# Altium PCB unicorn_1.PcbDoc
Units mm, origin at the board's own origin, x right, y up, seen from the top; angles counter-clockwise.
Board outline 47 x 47 mm, 2 copper layers (Top Layer, Bottom Layer); 55 components, 54 nets, 241 pads, 61 vias.
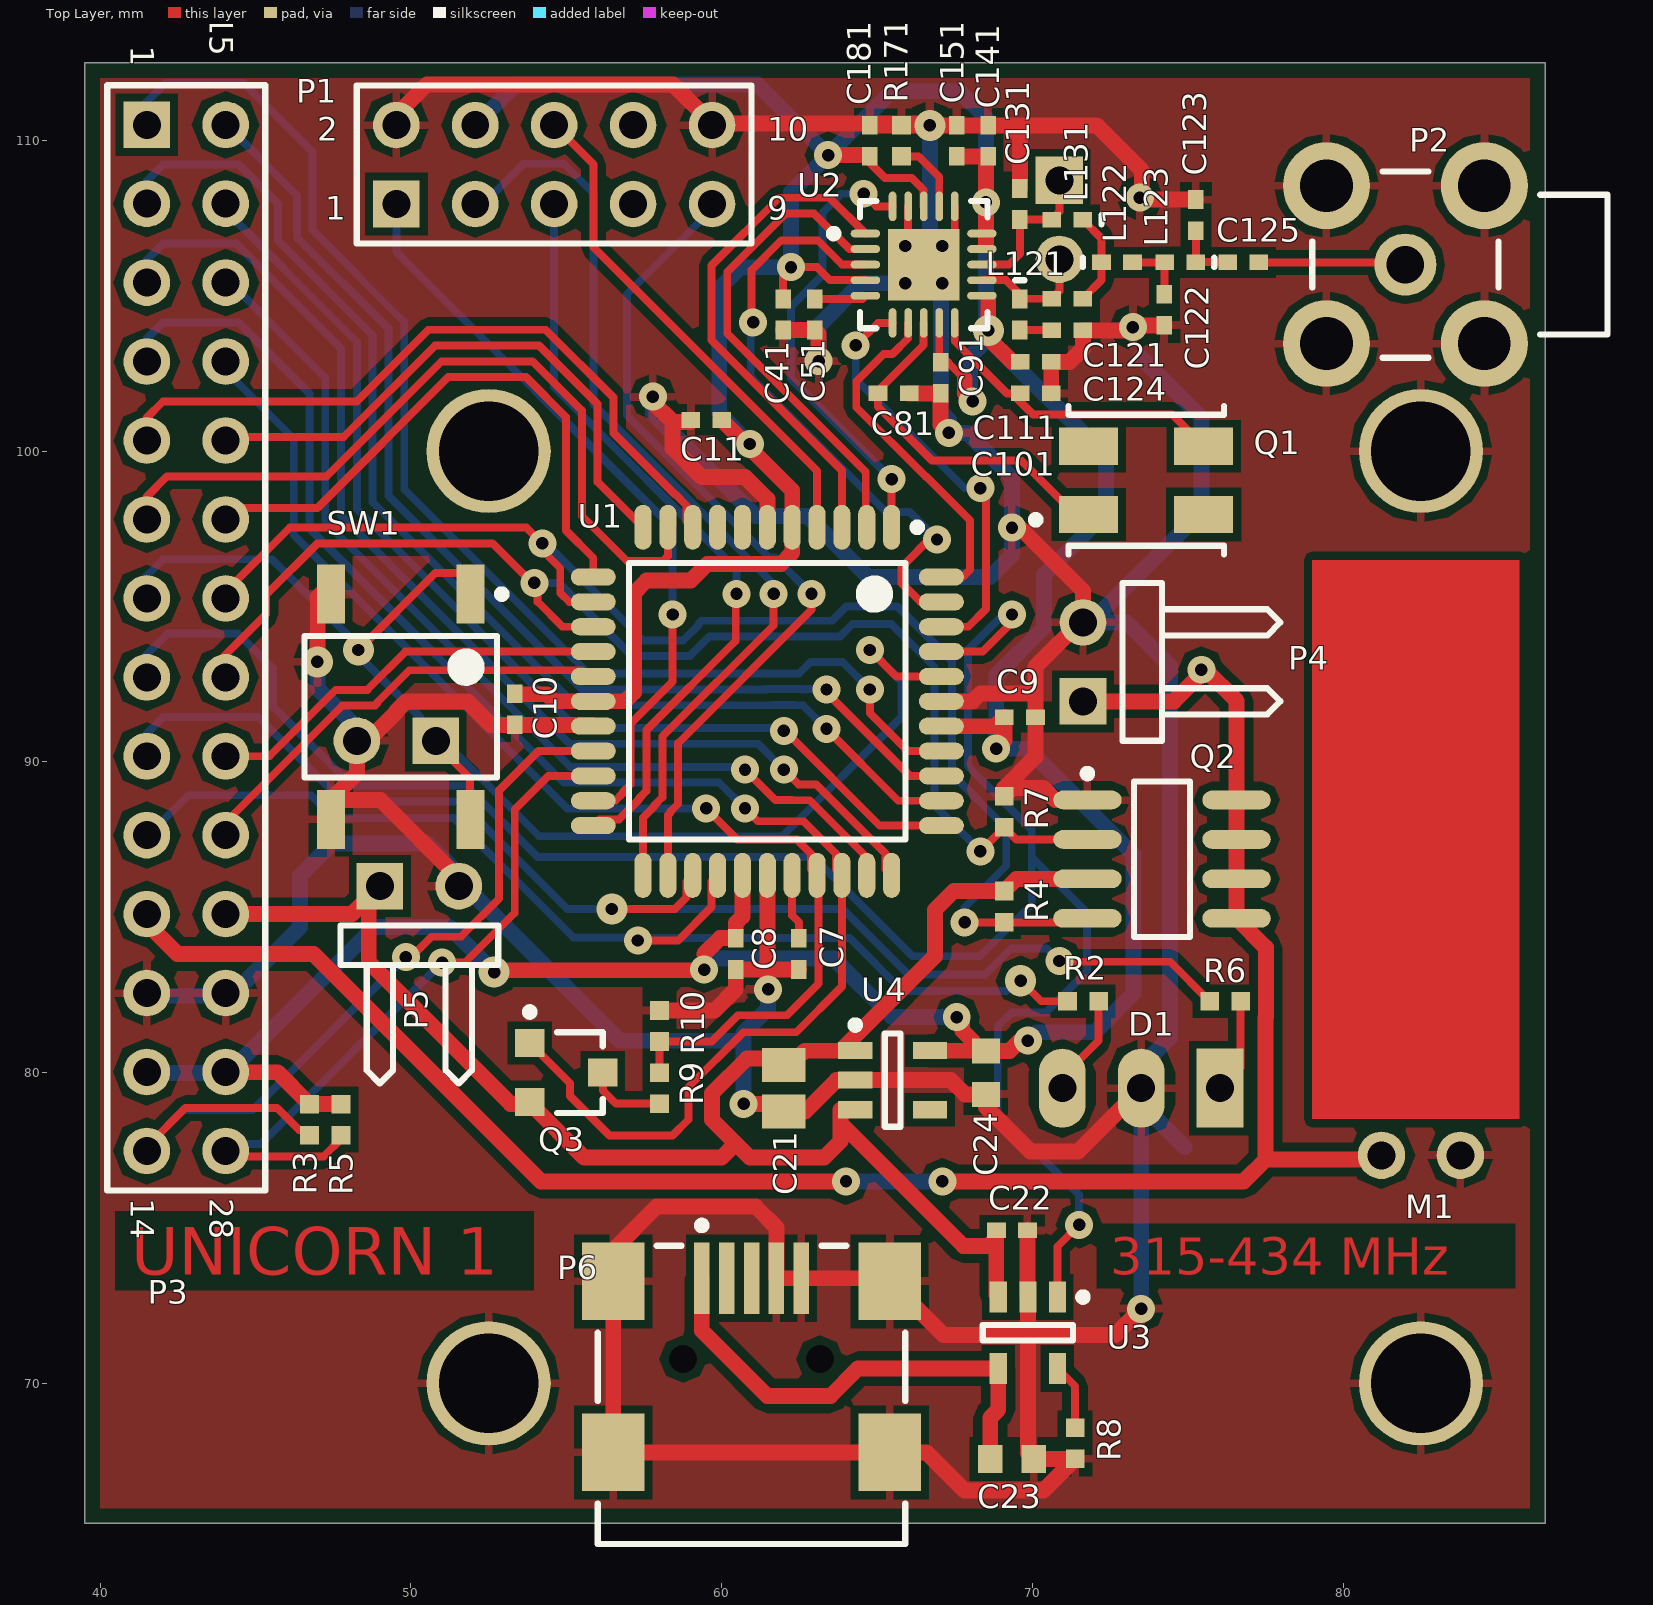
[diagram p0: Top Layer view]
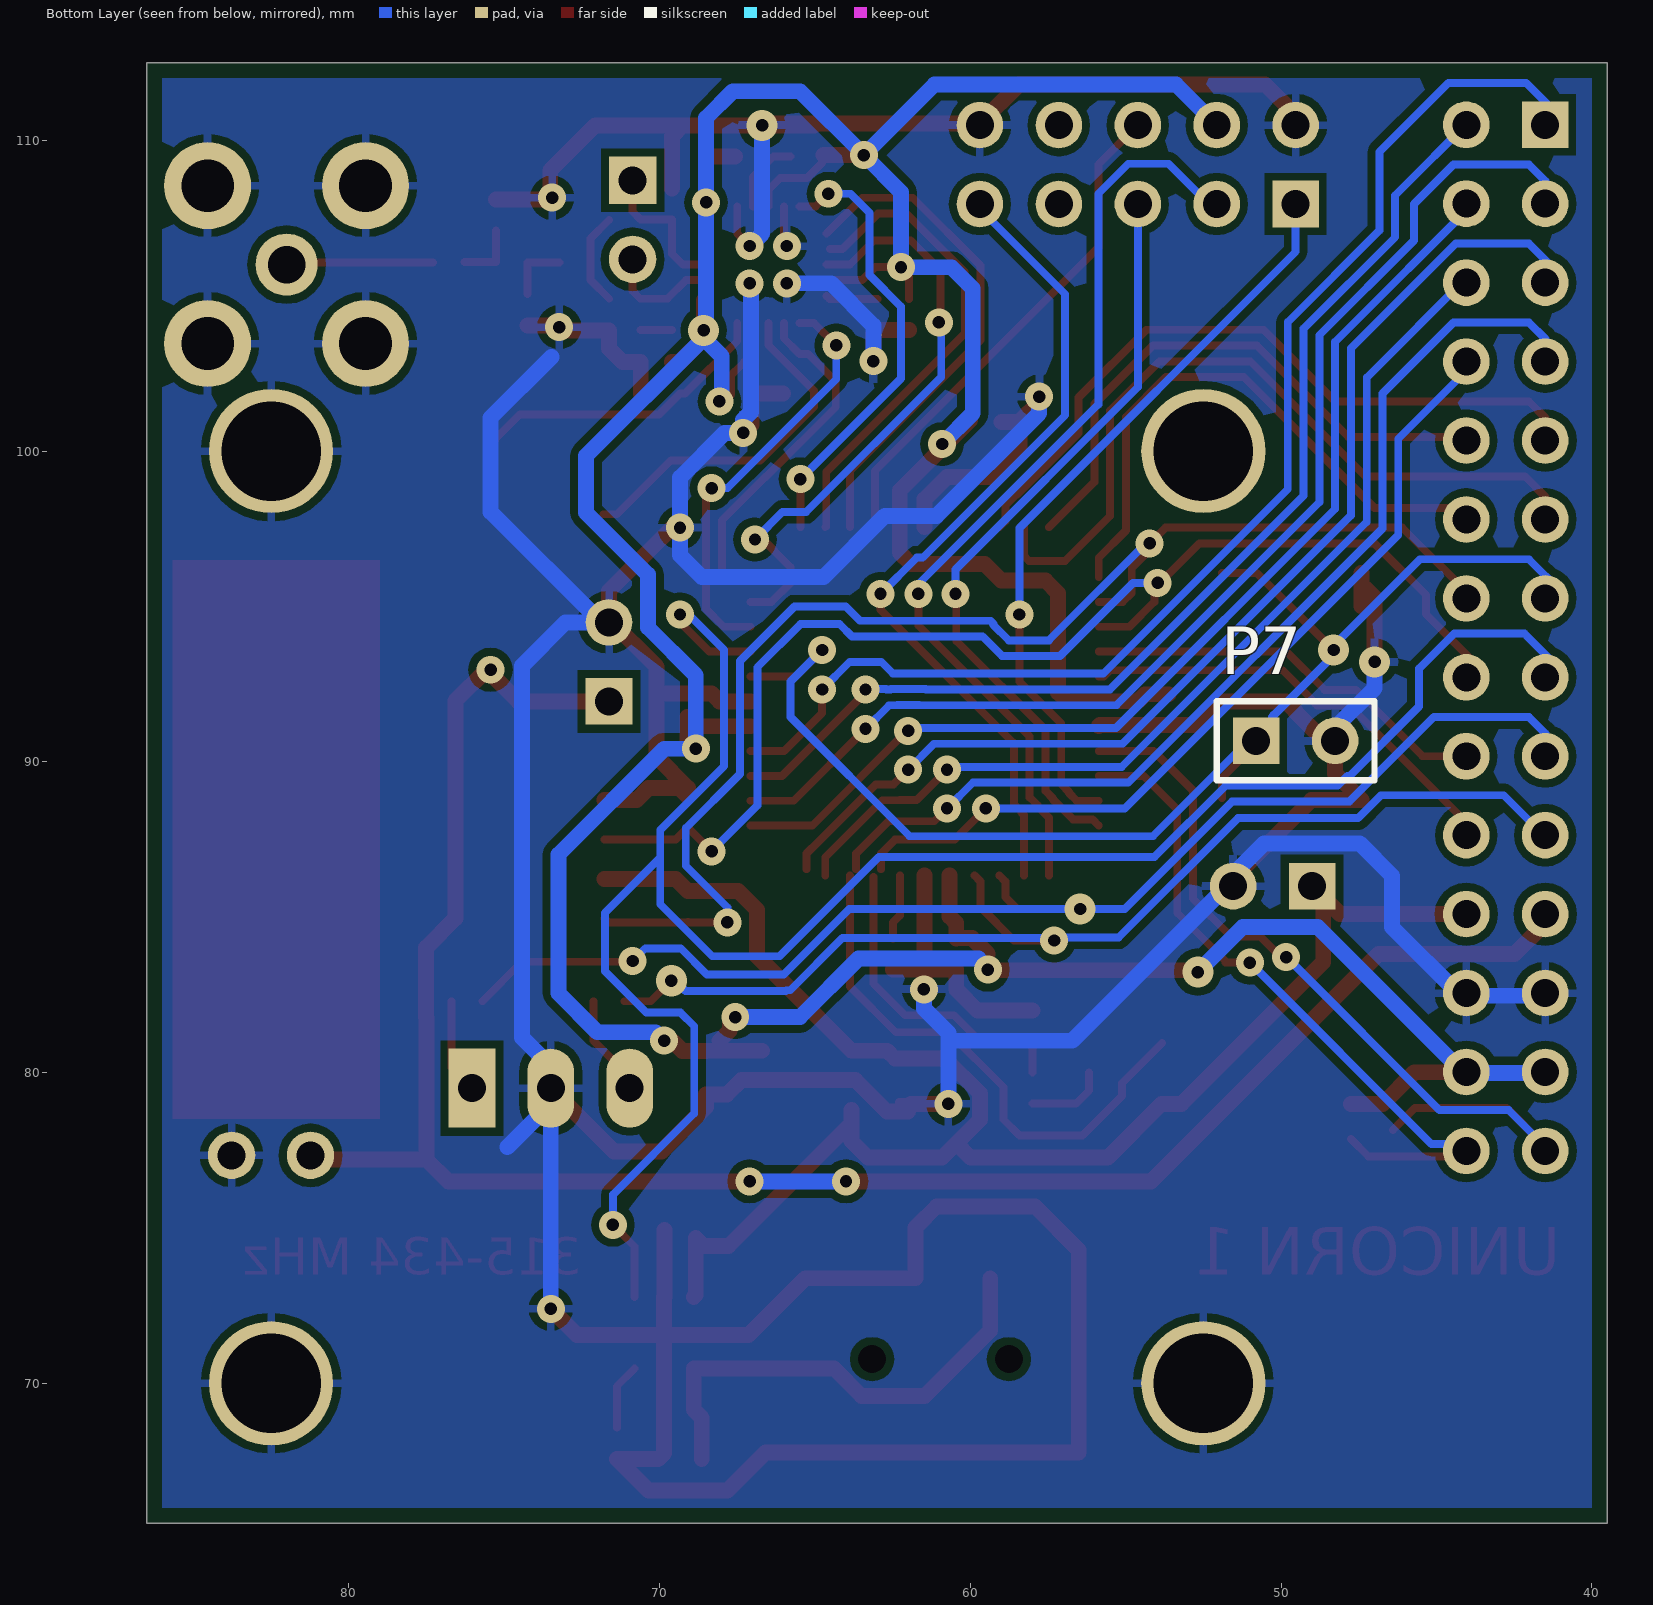
[diagram p1: Bottom Layer view, seen from below]

## Layer stack, top to bottom
Top Layer: signal copper 0.0356
Dielectric: dielectric 0.32, FR-4, Dk 4.8
Bottom Layer: signal copper 0.0356

## Board outline
39.5,112.5 86.5,112.5 86.5,65.5 39.5,65.5

## Design rules (kind name [scope] priority, off if disabled: settings)
Clearance [(IsVia) vs (IsVia)] p1 off: gap=0.2
Clearance Clearance_U1 [(InComponent('U1') or InComponent('U2'))] p2: gap=0.2
Clearance Clearance_1 [All] p3: gap=0.254
HoleSize [All] p1: absolutevalues=TRUE maxlimit=2.54 minlimit=0.4 maxpercent=80.000 minpercent=20.000
MinimumSolderMaskSliver MinimumSolderMaskSliver_U1 [(InComponent('U1') or InComponent('U2')) vs (InComponent('U1') or InComponent('U2'))] p1: minsoldermaskwidth=0.025
MinimumSolderMaskSliver [All] p2: minsoldermaskwidth=0.076
PlaneClearance [All] p1 off: clearance=0.508
PolygonConnect [All] p1: connectstyle=Relief reliefconductorwidth=0.254 reliefentries=4 polygonreliefangle="90 Angle"
RoomDefinition unicorn_1 [InComponentClass('unicorn_1')] p1: confinementstyle=ConfineIn formatcopy=TRUE lockcomponents=FALSE outline 0,0 146.71,0 146.71,143.535 0,143.535
RoutingVias [All] p1: holewidth=0.4 width=0.9 viastyle="Through Hole" minholewidth=0.254 minwidth=0.9 maxholewidth=0.42 maxwidth=1.27
SilkToSilkClearance [All] p1: silktosilkclearance=0.1
SilkscreenOverComponentPads [All] p1: minsilkscreentomaskgap=0.15
SolderMaskExpansion [All] p1: expansion=0.102
Width [(InNet('+3.3V') OR InNet('+BATT') OR InNet('OUT') OR InNet('+USB') OR InNet('GND'))] p1: maxlimit=0.512 minlimit=0.254 preferedwidth=0.254
Width Width_1 [All] p2: maxlimit=0.254 minlimit=0.254 preferedwidth=0.254
23 further rules are at their usual default settings.

## Components (designator, comment, footprint, x,y, rotation, side; value= is the part's Value field where it differs from the comment)
C7 "0.1uF" CAPC1005L 62.484,83.82 r270 top
C8 "0.1uF" CAPC1005L 60.452,83.82 r270 top
C9 "0.1uF" CAPC1005L 69.596,91.44 r0 top
C10 "0.1uF" CAPC1005L 53.34,91.694 r270 top
C11 "0.1uF" CAPC1005L 59.5,101 r180 top
C21 "10uF" CAPC2012L 62,79.5 r270 top
C22 "0.1uF" CAPC1005L 69.342,74.93 r180 top
C23 "1uF" CAPC1608L 69.342,67.564 r180 top
C24 "1uF" CAPC1608L 68.5,80 r270 top
C41 "100nF" CAPC1005L 61.976,104.394 r90 top
C51 "100nF" CAPC1005L 62.992,104.394 r90 top
C81 "27pF" CAPC1005L 65.532,101.854 r180 top
C91 "10nF" CAPC1005L 67.056,102.362 r90 top
C101 "27pF" CAPC1005L 70.104,101.854 r180 top
C111 "220pF" CAPC1005L 70.104,102.87 r180 top
C121 "6.8 pF" CAPC1005L 71.12,104.902 r180 top
C122 "12 pF" CAPC1005L 74.244,104.546 r90 top
C123 "6.8 pF" CAPC1005L 75.26,107.594 r270 top
C124 "220pF" CAPC1005L 71.12,103.886 r0 top
C125 "220pF" CAPC1005L 76.784,106.07 r180 top
C131 "6.8 pF" CAPC1005L 69.596,107.95 r90 top
C141 "10nF" CAPC1005L 68.58,109.982 r270 top
C151 "220pF" CAPC1005L 67.564,109.982 r270 top
C181 "220pF" CAPC1005L 64.77,109.982 r270 top
D1 "LEDx2 DIP" LEDx2 73.5,79.5 r270 top
L121 "33nH" INDC1005AL 69.596,104.394 r270 top
L122 "18nH" INDC1005AL 72.72,106.07 r0 top
L123 "33nH" INDC1005AL 74.752,106.07 r180 top
L131 "33nH" INDC1005AL 71.12,107.442 r180 top
M1 "Motor" Motor 82.5,87.5 r270 top
P1 "JTAG" HDR2X5 49.53,107.95 r0 top
P2 "COAX-F" MCX5.08-H5 82,106 r180 top
P3 "Header 14X2A" HDR2X14_CEN 41.5,110.5 r270 top
P4 "OUT" HDR1X2H 71.628,91.948 r90 top
P5 "POWER" HDR1X2H 49,86 r0 top
P6 "minUSB" 440479 60.96,65.532 r270 top
P7 "SW_connect" HDR1X2 50.8,90.678 r180 bottom
Q1 "quartz SMD" quartz_pattern 73.66,99.06 r0 top
Q2 "IRF9952" SO-8_N 74.168,86.868 r0 top
Q3 "IRLML6302" SOT-23 55,80 r270 top
R2 "100" RESC1005L 71.628,82.296 r180 top
R3 "10K" RESC1005L 46.736,78.486 r270 top
R4 "100K" RESC1005L 69.088,85.344 r270 top
R5 "10K" RESC1005L 47.752,78.486 r270 top
R6 "100" RESC1005L 76.2,82.296 r180 top
R7 "100K" RESC1005L 69.088,88.392 r90 top
R8 "2K" RESC1005L 71.374,68.072 r270 top
R9 "10K" RESC1005L 58,79.5 r90 top
R10 "10K" RESC1005L 58,81.5 r90 top
R171 "56K" RESC1005L 65.786,109.982 r270 top
SW1 "SWT-32" "SWT-32 pattern" 49.674,91.773 r270 top
U1 "ATmega32L-8AI" 44A_L 61.468,91.948 r270 top locked
U2 "CC1101" QFN50P397X397X80-20N 66.5,106 r0 top
U3 "LTC4054" SOT95P270X100-5N 69.85,71.628 r270 top
U4 "AAT3221" SOT95P280X145-5N 65.5,79.756 r0 top

## Footprints (in the part's own frame and the unit in brackets; to place one, negate y for a bottom-side part, rotate by r counter-clockwise, add the part's x,y. Pads: shape width x height; smd on the part's side, far side on the other; paste and mask are expansions set on the pad)
44A_L [mm] "Thin QFP, 44-Leads, Body 10x10mm, Pitch 0.8mm, IPC High Density"
  oval 1.45x0.55 smd: 1(-5.6,4) 2(-5.6,3.2) 3(-5.6,2.4) 4(-5.6,1.6) 5(-5.6,0.8) 6(-5.6,0) 7(-5.6,-0.8) 8(-5.6,-1.6) 9(-5.6,-2.4) 10(-5.6,-3.2) 11(-5.6,-4) 23(5.6,-4) 24(5.6,-3.2) 25(5.6,-2.4) 26(5.6,-1.6) 27(5.6,-0.8) 28(5.6,0) 29(5.6,0.8) 30(5.6,1.6) 31(5.6,2.4) 32(5.6,3.2) 33(5.6,4)
  oval 0.55x1.45 smd: 12(-4,-5.6) 13(-3.2,-5.6) 14(-2.4,-5.6) 15(-1.6,-5.6) 16(-0.8,-5.6) 17(0,-5.6) 18(0.8,-5.6) 19(1.6,-5.6) 20(2.4,-5.6) 21(3.2,-5.6) 22(4,-5.6) 34(4,5.6) 35(3.2,5.6) 36(2.4,5.6) 37(1.6,5.6) 38(0.8,5.6) 39(0,5.6) 40(-0.8,5.6) 41(-1.6,5.6) 42(-2.4,5.6) 43(-3.2,5.6) 44(-4,5.6)
  silkscreen extent -5.72,-4.45 4.45,4.95, body extent -5,-5 5,5, height 1.2
440479 [mm] "Connector; USB2.0, Type AB, SM; 5 Position; Right Angle"
  rect 2.3x0.5 smd: 1(-7.85,-1.6) 2(-7.85,-0.8) 3(-7.85,0) 4(-7.85,0.8) 5(-7.85,1.6)
  rect 2.5x2 smd: 6(-7.75,4.45) 7(-2.25,4.45) 8(-7.75,-4.45) 9(-2.25,-4.45)
  round 0.6 hole 0.9 unplated: MH1(-5.25,2.2) MH2(-5.25,-2.2)
  silkscreen extent -9.67,-4.95 0.7,4.95
CAPC1005L [mm] "Chip Capacitor, Body 1.0x0.5mm, IPC High Density"
  rect 0.6x0.5 smd: 1(-0.5,0) 2(0.5,0)
  body extent -0.55,-0.3 0.55,0.3, height 1.3
CAPC1608L [mm] "Chip Capacitor, Body 1.6x0.8mm, IPC High Density"
  rect 0.8x0.9 smd: 1(-0.7,0) 2(0.7,0)
  body extent -0.87,-0.48 0.87,0.48, height 1.3
CAPC2012L [mm] "Chip Capacitor, Body 2.0x1.3mm, IPC High Density"
  rect 1.1x1.4 smd: 1(-0.75,0) 2(0.75,0)
  body extent -1.1,-0.72 1.1,0.72, height 1.4
HDR1X2 [mm] "Connector; Header; 2 Position"
  rect 1.5x1.5 hole 0.9: 1(0,0)
  round 1.5 hole 0.9: 2(2.54,0)
  silkscreen extent -1.27,-1.27 3.81,1.27
HDR1X2H [mm] "Connector; Header; 2 Position; Right Angle"
  rect 1.5x1.5 hole 0.9: 1(0,0)
  round 1.5 hole 0.9: 2(2.54,0)
  silkscreen extent -1.27,-6.35 3.81,-1.27
HDR2X5 [mm] "Connector; Header; 5x2 Position"
  rect 1.5x1.5 hole 0.9: 1(0,0)
  round 1.5 hole 0.9: 2(0,2.54) 3(2.54,0) 4(2.54,2.54) 5(5.08,0) 6(5.08,2.54) 7(7.62,0) 8(7.62,2.54) 9(10.16,0) 10(10.16,2.54)
  silkscreen extent -1.27,-1.27 11.43,3.81
HDR2X14_CEN [mm] "Connector; Header; 14x2 Position"
  rect 1.5x1.5 hole 0.9: 1(0,0)
  round 1.5 hole 0.9: 2(2.54,0) 3(5.08,0) 4(7.62,0) 5(10.16,0) 6(12.7,0) 7(15.24,0) 8(17.78,0) 9(20.32,0) 10(22.86,0) 11(25.4,0) 12(27.94,0) 13(30.48,0) 14(33.02,0) 15(0,2.54) 16(2.54,2.54) 17(5.08,2.54) 18(7.62,2.54) 19(10.16,2.54) 20(12.7,2.54) 21(15.24,2.54) 22(17.78,2.54) 23(20.32,2.54) 24(22.86,2.54) 25(25.4,2.54) 26(27.94,2.54) 27(30.48,2.54) 28(33.02,2.54)
  silkscreen extent -1.27,-1.27 34.29,3.81
INDC1005AL [mm] "Chip Inductor, Body 1.0x0.5mm, IPC High Density"
  rect 0.6x0.5 smd: 1(-0.5,0) 2(0.5,0)
  silkscreen extent -1.1,-0.15 -1.1,0.15, body extent -0.55,-0.3 0.55,0.3, height 0.55
LEDx2 [mm]
  rect 2.54x1.508 hole 0.9: 1(0,2.54)
  oval 2.54x1.508 hole 0.9: 2(0,0) 3(0,-2.54)
MCX5.08-H5 [mm] "Connector; RF Coaxial, MCX, Thru-Hole; 5 Position; Right-Angle"
  round 2 hole 1.2: 1(0,0)
  round 2.8 hole 1.7: 2(-2.54,-2.54) 3(2.54,-2.54) 4(2.54,2.54) 5(-2.54,2.54)
  silkscreen extent -6.5,-3 3,3
Motor [mil] "площадка под вибромотор"
  round 60 hole 35.43: 1(400,50) 2(400,-50)
  Top Layer region: -354.33,-137.8 354.33,-137.8 354.33,125 -354.33,125
QFN50P397X397X80-20N [mm] "QFN, 20-Leads, Body 4,1x4,1mm (max), Pitch 0,50mm, IPC Medium Density"
  oval 0.95x0.25 smd: 1(-1.875,1) 2(-1.875,0.5) 3(-1.875,0) 4(-1.875,-0.5) 5(-1.875,-1) 11(1.875,-1) 12(1.875,-0.5) 13(1.875,0) 14(1.875,0.5) 15(1.875,1)
  oval 0.25x0.95 smd: 6(-1,-1.875) 7(-0.5,-1.875) 8(0,-1.875) 9(0.5,-1.875) 10(1,-1.875) 16(1,1.875) 17(0.5,1.875) 18(0,1.875) 19(-0.5,1.875) 20(-1,1.875)
  rect 2.3x2.3 smd: 21(0,0)
  silkscreen extent -3.02,-2.05 2.05,2.05, body extent -2.05,-2.05 2.05,2.05, height 0.8
quartz_pattern [mm] "LCC, 4-Pins, Body 5,0x3,2mm (max), Pitch 2,30mm, IPC Medium Density"
  rect 1.9x1.2 smd: 1(-1.85,-1.1) 2(1.85,-1.1) 3(1.85,1.1) 4(-1.85,1.1)
  silkscreen extent -3.68,-2.38 2.5,2.38, body extent -2.64,-1.6 2.5,1.74, height 1
RESC1005L [mm] "Chip Resistor, Body 1.1x0.5mm, IPC High Density"
  rect 0.6x0.6 smd: 1(-0.5,0) 2(0.5,0)
  body extent -0.55,-0.3 0.55,0.3, height 2.54
SO-8_N [mm] "SOIC, 8-Leads, Body 4.9x3.9mm, Pitch 1.27mm, IPC Medium Density"
  oval 2.2x0.6 smd: 1(-2.4,1.905) 2(-2.4,0.635) 3(-2.4,-0.635) 4(-2.4,-1.905) 5(2.4,-1.905) 6(2.4,-0.635) 7(2.4,0.635) 8(2.4,1.905)
  silkscreen extent -2.52,-2.5 0.9,2.88, body extent -1.95,-2.45 1.95,2.45, height 1.75
SOT95P270X100-5N [mm] "SOT23, 5-Leads, Body 2,9x2,8mm (max), Pitch 0,95mm, IPC Medium Density"
  rect 1x0.55 smd: 1(-1.15,0.95) 2(-1.15,0) 3(-1.15,-0.95) 4(1.15,-0.95) 5(1.15,0.95)
  silkscreen extent -1.27,-1.45 0.25,1.9, body extent -0.87,-1.45 0.87,1.45, height 1
SOT95P280X145-5N [mm] "SOT23, 5-Leads, Body 3,0x3,0mm (max), Pitch 0,95mm, IPC Medium Density"
  rect 1.1x0.55 smd: 1(-1.2,0.95) 2(-1.2,0) 3(-1.2,-0.95) 4(1.2,-0.95) 5(1.2,0.95)
  silkscreen extent -1.32,-1.5 0.25,1.9, body extent -0.85,-1.5 0.85,1.5, height 1.45
SOT-23 [mm] "SOT-23; 3 Leads; Body 3.1 x 2.5 mm, inc. leads (LxW max)"
  rect 0.9x0.95 smd: 1(-0.95,-1.175) 2(0.95,-1.175) 3(0,1.175)
  silkscreen extent -2.07,-1.3 1.3,1.18
"SWT-32 pattern" [mm] "SOP, 4-Leads, Body 6,2x6,2mm (max), Pitch 4,50mm, IPC Medium Density"
  rect 1.9x0.9 smd: 1(-3.625,2.25) 2(3.625,2.25) 3(-3.625,-2.25) 4(3.625,-2.25)
  silkscreen extent -3.75,-3.1 2.28,3.38, body extent -3.1,-3.1 3.1,3.1, height 3.2

## Part data
C7 C8 C9 C10 C11 C22 C23 C24 C41 C51 C81 C91 C101 C111 C121 C122 C123 C124 C125 C131 C141 C151 C181: library part "Cap Semi", "Capacitor (Semiconductor SIM Model)"
C21: library part "Cap Pol3", "Polarized Capacitor (Surface Mount)"
D1: library part LEDx2, "in DIP"
L121 L122 L123 L131: library part Inductor, "Inductor"
P1: library part "Header 5X2", "Header, 5-Pin, Dual row"
P2: "RF Coaxial PCB Connector, MCX; Thru-Hole, Right-Angle Mount Socket, Blunt Post Terminal, 50 Ohm Impedance"
P3: "Header, 14-Pin, Dual row"
P4 P5: library part "Header 2H", "Header, 2-Pin, Right Angle"
P6: library part 440478-2, "USB 2.0, Right Angle, SMT, A Type, Receptacle, 5 Position, Black"
P7: library part "Header 2", "Header, 2-Pin"
Q1: library part "qartz 0532", "в корпусе 0532"
Q2 Q3: "HEXFET Power MOSFET"
R2 R3 R4 R5 R6 R7 R8 R9 R10 R171: library part "Res Semi", "Semiconductor Resistor"
SW1: "Кнопка тактовая, поверхностный монтаж"
U1: "8-Bit AVR Microcontroller with 32K Bytes of In-System Programmable Flash Memory"
U2: "Low-Power Sub-1 GHz RF Transceiver"
U3: "Standalone Linear  Li-Ion Battery Charger with  Thermal Regulation in ThinSOT"
U4: "PowerLinear NanoPower low   dropout (LDO) linear regulator."

## Free pads (board coordinates)
  round 1.524 hole 0.9: 0(70.866,106.172)
  round 4 hole 3.2: 1(52.5,70) 1(52.5,100) 1(82.5,70) 1(82.5,100)
  rect 1.524x1.524 hole 0.9: 1(70.866,108.712)

## Via types
v1: diameter 0.9, hole 0.4, Top Layer to Bottom Layer, 50 vias
v2: diameter 1, hole 0.4, Top Layer to Bottom Layer, 7 vias
v3: diameter 0.9, hole 0.4, Top Layer to Bottom Layer, tented top, 4 vias

## Nets (pads, with @x,y where several pads share a name; then routed paths per layer and width w, separated by ;. In a path a pad name is that pad's centre, name@x,y a point inside that pad or via, vN(x,y) a via of type N, cw(c..) or ccw(c..) an arc to the next point about the centre after c; other vN are vias at no path point)
+3.3V: C8.1 C9.1 C10.1 C11.1 C24.1 C41.2 C91.2 C111.2 C141.2 C151.2 C181.2 P1.4 P3.13 P3.27 R3.1 R5.1 U1.5 U1.17 U1.27 U1.38 U2.4 U2.9 U2.11 U2.14 U2.15 U2.18 U4.5 | length 148.5
  Top Layer w0.254: C41.2 61.976,105.664 v1(62.23,105.918) 63.068,105.918 63.486,105.5 U2.4 ; C181.2 64.77,109.271 65.253,108.788 66.116,108.788 66.5,108.404 U2.18 ; C91.2@67,103.06 U2.9 ; C91.2@67.277,102.862 67.818,102.321
  Top Layer w0.508: P3.27@44.04,80.238 44.268,80.01 45.712,80.01 R3.1 R5.1 ; v2@53.13,83.294 v1@59.418,83.294 ; 53.611,92.177 54.381,92.177 54.61,91.948 U1.17 56.891,91.948 57.175,92.233 57.175,95.428 57.582,95.834 59.004,95.834 59.539,96.369 61.91,96.369 62.268,96.727 U1.5 62.268,98.732 C11.1 ; 59.436,83.82 59.944,84.328 60.444,84.328 C8.1 60.452,84.811 60.668,85.027 U1.27 ; v1(63.424,109.525) C181.2@64.727,109.525 ; U4.5 C24.1@68.5,80.706 ; U1.38 68.804,91.148 C9.1 v1@69.096,90.686 ; C151.2 68.504,109.482 v1(68.504,108.001) 68.504,106.68 ; v1@67.742,81.788 67.742,81.356 C24.1@68.072,81.026 ; v1@67.818,101.854 67.818,102.321 ; C24.1 69.27,80.7 v1@69.596,81.026 ; 68.58,104.851 v2(68.58,103.886) 68.58,103.642 69.352,102.87 C111.2
  Bottom Layer w0.508: P3.13@41.5,80.238 41.753,79.985 44.12,79.985 48.819,84.684 51.232,84.684 v2(52.68,83.236) ; P1.4@51.764,110.184 53.378,111.798 61.151,111.798 v1(63.424,109.525) ; 59.741,83.668 63.602,83.668 65.481,81.788 v1(67.564,81.788) v1@67.742,81.788 ; v1(60.909,100.228) 59.919,101.219 59.919,105.232 60.604,105.918 v1(62.23,105.918) 62.23,108.331 v1(63.424,109.525) ; v1@68,101.6 68,103.052 68.58,103.632 72.365,99.847 72.365,98.02 70.37,96.025 70.37,94.322 68.834,92.786 v1(68.834,90.424) 69.85,90.424 73.254,87.02 73.254,82.554 72,81.3 v1@70.124,81.3 ; v2(68.58,103.886) 68.504,103.962 v1(68.504,108.001) 68.504,110.719 67.64,111.582 65.481,111.582 v1(63.424,109.525)
  other v1: 69.85,81.026 59.436,83.312 68.072,101.6
+BATT: C21.1 C22.2 P3.25 P5.1 Q2.3 Q3.2 R4.1 U3.3 U4.1 U4.3 | length 54.2
  Top Layer w0.508: P3.25@43.9,85.1 48.1,85.1 P5.1 ; P5.1@48.641,85.641 48.641,83.557 53.204,78.994 53.848,78.994 55.578,77.264 59.992,77.264 60.452,77.724 ; C21.1@61.53,80.456 C21.1@61.976,80.456 ; U3.3 68.834,72.844 68.834,74.676 68.58,74.422 67.778,74.422 63.824,78.376 63.824,78.806 63.824,77.794 63.294,77.264 60.912,77.264 59.69,78.486 59.69,79.333 60.813,80.456 C21.1@61.976,80.456 ; Q2.3 69.477,86.233 R4.1 67.471,85.844 66.86,85.233 66.86,83.742 63.824,80.706 62.672,80.706 62.422,80.456 C21.1@61.976,80.456
+USB: C23.2 P6.1 U3.4 | length 15.5
  Top Layer w0.508: P6.1 59.36,71.704 61.468,69.596 63.5,69.596 64.382,70.478 U3.4 68.9,69.154 68.642,68.896 C23.2
CC_CS: U1.44 U2.7 | length 11.3
  Top Layer w0.254: U2.7 66,103.629 65.495,103.124 65.213,103.124 64.331,102.242 64.331,101.411 66.555,99.187 66.573,99.187 67.996,97.765 67.996,96.19 67.754,95.948 U1.44
CC_GDO0: U1.42 U2.6 | length 13.6
  Top Layer w0.254: v1(64.313,103.403) 65.034,104.125 U2.6 ; U1.42 67.932,94.348 68.504,94.92 v1@68.504,98.806
  Bottom Layer w0.254: v1(64.313,103.403) 64.313,102.311 67.818,98.806 v1(68.326,98.806)
CC_GDO2: U1.43 U2.3 | length 20.1
  Top Layer w0.254: v1(61.011,104.14) 61.214,104.14 60.96,104.394 60.96,105.823 61.918,106.782 63.094,106.782 63.875,106 U2.3 ; v1@66.802,97.282 65.786,96.266 65.786,95.758 66.396,95.148 U1.43
  Bottom Layer w0.254: v1(61.011,104.14) 61.214,104.14 60.935,103.861 60.935,102.387 65.278,98.044 66.04,98.044 v1(66.929,97.155)
CC_MISO: U1.2 U2.2 | length 15.7
  Top Layer w0.254: U2.2@64.516,106.502 64.11,106.502 62.967,107.645 62.064,107.645 60.18,105.761 60.18,103.781 64.637,99.324 64.637,97.579 U1.2
CC_MOSI: U1.1 U2.20 | length 14.2
  Top Layer w0.254: v1(64.567,108.28) 64.972,107.875 U2.20@65.492,107.875 ; U1.1 v1@65.468,99.314
  Bottom Layer w0.254: v1@64.389,108.458 64.389,108.509 64.16,108.28 63.856,108.28 63.246,107.671 63.246,105.664 62.23,104.648 62.23,102.337 65.126,99.441
  other v1: 65.468,99.099
CC_SCK: U1.3 U2.1 | length 16.5
  Top Layer w0.254: U1.3 63.868,99.375 59.672,103.571 59.672,105.972 61.853,108.153 63.472,108.153 U2.1
GND: C7.2 C8.2 C9.2 C10.2 C11.2 C21.2 C22.1 C23.1 C24.2 C41.1 C51.1 C81.1 C91.1 C101.1 C111.1 C122.1 C123.1 C124.2 C131.2 C141.1 C151.1 C181.1 D1.2 M1.1 P1.2 P1.10 P2.2 P2.3 P2.4 P2.5 P3.12 P3.26 P4.2 P5.2 P6.4 P6.5 P6.6 P6.7 P6.8 P6.9 P7.2 pad.1@52.5,70 pad.1@82.5,70 pad.1@82.5,100 Q2.1 R7.2 R8.2 R10.2 R171.1 SW1.3 SW1.4 U1.6 U1.18 U1.28 U1.39 U2.16 U2.19 U2.21 U3.2 U4.2 | length 267.8
  Top Layer w0.254: C21.2@61.914,78.994 61.976,79.056 C21.2@62.292,79.056 ; U2.21@66,106.5 U2.19 ; v3(67.1,106.6) 67.5,107 U2.16
  Top Layer w0.512: v2(46.99,93.218) 46.99,95.283 SW1.3@47.28,95.573 ; SW1.3@47.407,95.007 SW1.3@47.407,96.081 ; P1.2@49.258,110.54 50.518,111.8 58.43,111.8 59.69,110.54 v2@66.642,110.54 ; P5.2 51.54,86.255 49.022,88.773 47.407,88.773 48.26,89.626 48.26,90.329 49.54,91.609 49.54,91.639 49.839,91.938 49.869,91.938 49.879,91.948 51.816,91.948 52.58,91.184 55.832,91.184 U1.18 ; v1(57.785,101.752) 57.785,101.575 58.42,100.94 ; R10.2 59.775,82 60.452,82.677 C8.2 61.468,83.32 ; C11.2@59,100.94 58.42,100.94 ; v1(60.706,78.994) C21.2@61.914,78.994 ; v1@61.468,82.677 61.468,83.32 ; U1.28 61.468,83.32 ; U1.6 61.468,98.452 60.758,99.162 59.36,99.162 58.42,100.101 58.42,100.94 ; C41.1 C51.1 63.119,103.767 v1(63.119,102.895) ; C21.2 62.688,78.75 63.694,79.756 ; C7.2 61.468,83.32 ; U4.2@63.824,79.756 U4.2 67.372,79.756 67.828,79.3 C24.2 68.5,78.9 69.932,77.468 71.468,77.468 D1.2@73.486,79.486 ; 65.024,110.482 C141.1 69.248,110.482 69.594,110.136 C131.2@69.594,108.45 ; C81.1 67.046,101.854 67.046,100.848 v1(67.31,100.584) ; v2(66.7,110.482) 72.068,110.482 73.516,109.034 73.516,108.094 C123.1 ; U1.39 68.072,91.948 68.328,92.204 69.848,92.204 ; v1@69.469,97.663 71.628,95.504 71.628,94.59 70.096,93.058 C9.2 70.096,90.162 69.088,89.154 R7.2 69.35,89.154 70.358,89.154 70.739,88.773 Q2.1 ; U3.2@69.842,72.786 C22.1 ; U3.2 69.85,71.552 ; C101.1 C111.1 71.196,102.87 71.62,103.294 C124.2 v1@73.228,103.886 ; R8.2 R8.2@71.366,67.564 ; v1@73.389,104.046 C122.1 ; v1(73.5,72.4) 72.652,71.552 69.85,71.552 ; 69.85,71.552 67.14,71.552 P6.6 65.31,73.382 P6.5 P6.4 61.76,75.019 61.087,75.692 57.912,75.692 56.51,74.29 P6.8 P6.9 P6.7 66.584,67.782 67.818,66.548 70.35,66.548 R8.2@71.366,67.564 ; 69.85,71.552 69.85,67.756 C23.1 R8.2@71.366,67.564
  Bottom Layer w0.512: P3.12@41.288,82.474 44.221,82.474 46.431,84.684 46.431,86.335 47.473,87.376 50.546,87.376 51.54,86.382 P5.2 ; v2(46.99,93.218) 46.99,92.374 48.26,91.104 P7.2 ; P5.2@51.892,85.852 56.718,81.026 60.452,81.026 ; v1(57.785,101.752) 57.785,101.219 61.087,97.917 62.75,97.917 64.719,95.948 68.643,95.948 69.342,96.647 69.342,99.148 67.906,100.584 v1(67.31,100.584) 67.31,101.004 67.054,101.26 67.054,105.354 v3(67.1,105.4) ; v1(60.706,78.994) 60.706,81.28 61.493,82.067 v1(61.493,82.677) ; v1(63.119,102.895) 63.119,104.038 64.481,105.4 v3(65.9,105.4) ; v2(66.7,110.482) 66.7,107 v3(67.1,106.6) ; P4.2 P4.2@71.882,94.488 ; P4.2@71.806,94.412 P4.2@71.882,94.488 ; 73.482,103.022 75.438,101.067 75.438,98.044 P4.2@71.882,94.488 ; v1(73.5,72.4) 73.5,79 74.9,77.6 ; D1.2@73.5,80.2 74.422,81.122 74.422,93.091 73.025,94.488 P4.2@71.882,94.488
  other v1: 69.342,97.536 73.228,103.988 73.457,108.153
  other v3: 65.9,106.6
NetC7_1: C7.1 U1.29 | length 2.1
  Top Layer w0.254: U1.29 62.268,85.052 62.484,84.836 C7.1
NetC51_2: C51.2 U2.5 | length 1.7
  Top Layer w0.254: C51.2 64.527,104.894 U2.5@64.625,104.992
NetC121_1: C121.1 L122.1 L131.1 | length 3
  Top Layer w0.254: C121.1 72.22,105.502 72.22,106.842 L131.1
NetC121_2: C121.2 L121.1 pad.0 U2.12 | length 3.9
  Top Layer w0.254: U2.12 69.15,105.5 69.748,104.902 C121.2 70.866,105.148 pad.0
NetC122_2: C122.2 L122.2 L123.2 | length 2
  Top Layer w0.254: L122.2 L123.2 C122.2@74.252,105.054
NetC123_2: C123.2 C125.2 L123.1 | length 2
  Top Layer w0.254: C123.2 75.26,106.078 C125.2@76.276,106.078
NetC124_1: C124.1 L121.2 | length 1
  Top Layer w0.254: L121.2 C124.1@70.612,103.894
NetC125_1: C125.1 P2.1 | length 4.7
  Top Layer w0.254: C125.1 81.93,106.07 P2.1
NetC131_1: C131.1 L131.2 pad.1@70.866,108.712 U2.13 | length 4.8
  Top Layer w0.254: U2.13 69.246,106 69.596,106.35 C131.1 70.612,107.45 70.866,107.704 pad.1@70.866,108.712
NetD1_1: D1.1 R6.1 | length 3.1
  Top Layer w0.254: D1.1 76.7,80.16 R6.1
NetD1_3: D1.3 R2.1 | length 2.9
  Top Layer w0.254: D1.3@70.988,79.888 72.128,81.028 R2.1
NetQ3_3: Q3.3 R9.1 | length 2.6
  Top Layer w0.254: Q3.3 56.175,79.425 56.6,79 R9.1
NetR8_1: R8.1 U3.5 | length 2.1
  Top Layer w0.254: U3.5 71.374,69.904 R8.1
NetR171_2: R171.2 U2.17 | length 2.4
  Top Layer w0.254: R171.2 66.337,109.482 67,108.819 U2.17
OUT: M1.2 P3.11 P4.1 Q2.5 Q2.6 Q2.7 Q2.8 | length 64.8
  Top Layer w0.512: P3.11@41.351,84.951 42.482,83.82 46.863,83.82 54.183,76.5 v1(64,76.5) ; v1(67.1,76.5) 76.8,76.5 77.5,77.2 ; P4.1 74.549,91.948 75.565,92.964 76.568,91.961 Q2.8 Q2.7 Q2.6 Q2.5 77.51,84.021 77.51,81.785 77.5,81.775 77.5,77.2 ; M1.2 81.09,77.2 77.5,77.2
  Bottom Layer w0.512: v1(64,76.5) v1(67.1,76.5) v1@67.2,76.5
  other v1: 75.438,92.964
PA0: P3.1 U1.37 | length 41.1
  Top Layer w0.254: v1(64.77,92.329) 64.77,91.567 65.989,90.348 U1.37
  Bottom Layer w0.254: P3.1@40.984,110.718 42.115,111.849 44.615,111.849 46.838,109.626 46.838,107.096 49.784,104.149 49.784,98.774 55.721,92.837 61.225,92.837 61.235,92.847 62.494,92.847 62.865,93.218 63.881,93.218 v1(64.77,92.329) ; P3.1@41.492,110.718 P3.1@41.492,110.972
PA1: P3.15 U1.36 | length 36.3
  Top Layer w0.254: v1@63.326,92.282 66.059,89.548 U1.36
  Bottom Layer w0.254: P3.15@43.524,110.718 43.841,110.718 46.33,108.229 46.33,106.885 49.276,103.939 49.276,98.563 55.51,92.329 61.435,92.329 61.445,92.339 62.555,92.339 62.565,92.329 62.694,92.329 62.704,92.339 63.363,92.339 v1(63.373,92.329)
PA2: P3.2 U1.35 | length 38.6
  Top Layer w0.254: v1(63.373,91.059) 65.684,88.748 U1.35
  Bottom Layer w0.254: P3.2@41.492,108.178 41.492,108.686 42.026,109.22 44.45,109.22 45.72,107.95 45.72,106.776 48.768,103.728 48.768,98.353 55.3,91.821 61.646,91.821 61.656,91.831 62.344,91.831 62.354,91.821 62.611,91.821 v1(63.373,91.059)
PA3: P3.16 U1.34 | length 35.1
  Top Layer w0.254: v1@62.017,91.018 65.087,87.948 U1.34
  Bottom Layer w0.254: P3.16@43.524,108.178 43.6,108.178 48.26,103.518 48.26,98.143 55.314,91.089 61.911,91.089 v1(62,91)
PA4: P3.3 U1.33 | length 37
  Top Layer w0.254: v1(62,89.75) 62.477,89.274 63.043,89.274 64.877,87.44 ; 64.877,87.44 65.27,87.047 U1.33@65.27,86.546 ; U1.33@65.273,86.543 65.273,87.049
  Bottom Layer w0.254: P3.3@40.984,105.638 42.026,106.68 44.379,106.68 47.752,103.307 47.752,97.932 55.103,90.581 61.169,90.581 v1(62,89.75)
PA5: P3.17 U1.32 | length 32.2
  Top Layer w0.254: v1(60.75,89.75) 61.727,88.773 62.259,88.773 62.266,88.766 62.833,88.766 64.668,86.93 U1.32
  Bottom Layer w0.254: P3.17@43.524,105.638 43.968,105.638 47.244,102.362 47.244,97.722 55.127,89.839 60.661,89.839 v1(60.75,89.75) ; P3.17@44.032,105.602 P3.17@44.032,105.638
PA6: P3.4 Q3.1 U1.31 | length 51.2
  Top Layer w0.254: Q3.1 55.118,79.657 55.118,79.248 56.388,77.978 58.42,77.978 58.928,78.486 58.928,79.528 60.7,81.3 62.4,81.3 63.868,82.768 U1.31 ; v1(60.75,88.5) 61.163,88.087 62.63,88.087 63.67,87.047 U1.31@63.67,86.546 ; U1.31@63.673,86.543 63.673,87.049
  Bottom Layer w0.254: P3.4@41.492,103.098 41.492,103.606 42.026,104.14 44.45,104.14 46.736,101.854 46.736,97.511 54.916,89.331 59.919,89.331 v1(60.75,88.5)
PA7: P3.18 R9.2 R10.1 U1.30 | length 39.1
  Top Layer w0.254: R9.2 R10.1 59.676,81 60.522,81.846 62.099,81.846 63.121,82.868 U1.30@63.121,86.295 ; v1(59.5,88.5) 60.5,87.5 62.417,87.5 62.87,87.047 U1.30@62.87,86.546 ; U1.30@62.873,86.543 62.873,87.049
  Bottom Layer w0.254: P3.18@43.524,103.098 46.228,100.394 46.228,97.301 55.029,88.5 v1(59.5,88.5)
PB0: P3.7 P7.1 SW1.1 SW1.2 U1.40 | length 43.7
  Top Layer w0.254: P3.7@41.492,95.224 P3.7@41.492,95.478 ; v2(48.311,93.599) 50.793,96.081 SW1.1@51.907,96.081 ; P7.1@50.673,90.729 50.673,90.703 51.907,89.469 SW1.2@51.907,88.831 ; v1(64.77,93.599) 65.621,92.748 U1.40
  Bottom Layer w0.254: P3.7@40.984,95.478 42.026,96.52 45.53,96.52 48.311,93.739 48.311,93.421 50.241,91.491 ; 50.241,91.516 50.241,91.491 ; 50.292,91.44 50.241,91.491 ; v1(64.77,93.599) 65.786,92.583 65.786,91.44 61.951,87.605 54.127,87.605 50.457,91.275 50.241,91.058 50.241,91.491
PB1: P3.8 U1.41 U3.1 | length 66.8
  Top Layer w0.254: U1.41 68.402,93.548 v1@69.342,94.488 ; U3.1 70.8,74.4 v1(71.5,75.1)
  Bottom Layer w0.254: P3.8@40.984,92.938 42.095,94.049 ; 42.164,94.129 44.428,94.129 45.559,92.998 45.559,91.779 47.792,89.547 47.86,89.547 48.176,89.23 51.783,89.23 54.069,86.944 62.937,86.944 66.137,83.744 68.301,83.744 69.977,85.42 69.977,86.919 ; v1(69.342,94.742) 69.063,94.742 67.92,93.599 67.92,89.865 69.977,87.808 69.977,86.919 ; v1(71.5,75.1) 71.5,76.074 68.885,78.689 68.885,81.49 69.33,81.935 70.429,81.935 71.755,83.261 71.755,85.141 69.977,86.919
PC6: P3.9 R6.2 U1.25 | length 43.1
  Top Layer w0.254: v2(56.464,85.266) 58.491,85.266 58.873,85.647 58.873,86.153 U1.25 ; v1@70.612,83.82 70.866,83.566 74.43,83.566 R6.2
  Bottom Layer w0.254: P3.9@41.492,90.398 41.492,90.906 42.026,91.44 45.085,91.44 47.803,88.722 51.573,88.722 55.03,85.266 v2(56.464,85.266) ; v2@56.464,85.268 63.895,85.268 66.003,83.16 68.478,83.16 69.319,84 70.457,84 v1(70.866,83.591)
PC7: P3.10 R2.2 U1.26 | length 37
  Top Layer w0.254: v1(57.302,84.252) 58.598,84.252 59.673,85.327 59.673,86.153 U1.26 ; v2(69.621,82.956) 70.282,82.296 R2.2
  Bottom Layer w0.254: P3.10@41.517,87.604 42.839,88.925 46.787,88.925 47.523,88.189 51.388,88.189 55.223,84.353 v1@57.201,84.353 ; v1@57.302,84.328 64.116,84.328 65.793,82.652 65.913,82.652 65.938,82.626 69.164,82.626 69.494,82.956 v2(69.621,82.956)
PD4: P3.21 Q2.4 R4.2 U1.13 | length 44.5
  Top Layer w0.254: P3.21@43.524,95.478 44.043,95.478 46.101,97.536 53.721,97.536 v1(54.229,97.028) ; v1@54.229,96.806 54.806,96.229 54.806,95.435 55.093,95.148 U1.13 U1.13@55.253,95.148 ; v1(67.818,84.836) 69.08,84.836 R4.2 ; R4.2@69.088,84.836 71.641,84.836 Q2.4
  Bottom Layer w0.254: v1@54.292,97.091 57.473,93.911 58.764,93.911 59.251,94.398 59.251,94.437 59.353,94.539 63.551,94.539 64.008,94.996 65.659,94.996 67.412,93.243 67.412,89.611 69.157,87.866 69.157,86.658 67.818,85.319 v1(67.818,84.836)
PD5: P3.22 Q2.2 R7.1 U1.14 | length 41.1
  Top Layer w0.254: P3.22@43.524,92.938 45.339,94.753 45.339,95.377 46.99,97.028 52.629,97.028 v1@53.645,96.012 ; v1@53.657,96.025 54.077,95.606 54.077,95.148 54.877,94.348 U1.14 ; v1(68.326,87.122) 69.088,87.884 R7.1 69.477,87.503 Q2.2
  Bottom Layer w0.254: v1(53.975,95.758) 54.762,95.758 57.117,93.403 58.975,93.403 59.602,94.031 63.805,94.031 64.204,94.43 65.463,94.43 66.853,93.04 66.853,88.595 v1(68.326,87.122)
PD6: P3.23 U1.15 | length 13.2
  Top Layer w0.254: P3.23 45.444,90.18 47.581,92.317 48.598,92.317 49.829,93.548 U1.15
PD7: P3.24 U1.16 | length 14.4
  Top Layer w0.254: P3.24 44.04,88.057 47.792,91.809 48.839,91.809 48.903,91.873 48.903,91.903 49.946,92.946 55.507,92.946 55.705,92.748 U1.16
Q1: C81.2 Q1.1 U2.8 | length 11.5
  Top Layer w0.254: U2.8 66.5,103.411 65.032,101.943 C81.2 65.032,101.428 66.765,99.695 69.639,99.695 71.366,97.968 Q1.1@71.81,97.968
Q2: C101.2 Q1.3 U2.10 | length 10
  Top Layer w0.254: U2.10 67.5,103.537 69.183,101.854 69.342,101.854 70.02,101.176 74.494,101.176 Q1.3
RESET: P1.6 U1.4 | length 16.4
  Top Layer w0.254: P1.6 55.88,109.22 55.88,106.553 63.068,99.365 U1.4
RX0: P3.5 U1.9 | length 22.9
  Top Layer w0.254: P3.5@41.492,100.558 41.492,101.066 42.026,101.6 48.264,101.6 50.569,103.905 54.333,103.905 56.515,101.723 56.515,100.584 58.499,98.6 58.517,98.6 58.873,98.244 58.873,97.743 U1.9
RX1: P3.19 U1.11 | length 18.9
  Top Layer w0.254: P3.19@43.688,100.457 47.839,100.457 50.779,103.397 54.123,103.397 56.007,101.513 56.007,99.009 U1.11
SCL: P3.14 R3.2 U1.19 | length 28.4
  Top Layer w0.254: P3.14@40.984,77.698 41.579,77.698 42.748,78.867 45.687,78.867 46.403,78.151 ; v1@49.721,83.833 50.12,83.833 50.659,84.372 51.606,84.372 52.832,85.598 52.832,89.078 54.102,90.348 U1.19
  Bottom Layer w0.254: P3.14@40.984,77.698 41.579,77.698 42.672,78.791 44.9,78.791 49.828,83.718 v1(49.835,83.718)
SDA: P3.28 R5.2 U1.20 | length 23.8
  Top Layer w0.254: P3.28@43.524,77.698 43.917,77.305 47.194,77.305 R5.2@47.752,77.863 ; v1(51.003,83.541) 51.791,83.541 ; 51.799,83.601 53.34,85.142 53.34,88.468 54.42,89.548 U1.20
  Bottom Layer w0.254: P3.28@43.524,77.698 45.161,77.698 v1(51.003,83.541)
TCK: P1.1 U1.21 | length 24.9
  Top Layer w0.254: U1.21 56.577,88.748 56.828,88.999 56.828,89.033 57.074,89.279 57.074,91.233 58.42,92.579 58.42,94.488 58.166,94.742 v1(58.42,94.742)
  Bottom Layer w0.254: P1.1@49.175,108 49.53,107.645 49.53,106.418 58.42,97.528 v1(58.42,94.742)
TDI: P1.9 U1.24 | length 26.5
  Top Layer w0.254: U1.24 58.268,88.284 58.352,88.367 58.352,88.401 ; 58.363,88.413 58.598,88.647 58.598,90.602 62.89,94.894 v1(62.89,95.402)
  Bottom Layer w0.254: P1.9@59.28,107.38 56.947,105.047 56.947,101.156 61.532,96.571 61.722,96.571 v1(62.89,95.402)
TDO: P1.3 U1.23 | length 30.7
  Top Layer w0.254: U1.23 57.468,88.202 57.844,88.578 57.844,88.612 58.09,88.858 58.09,90.812 61.671,94.394 v1(61.671,95.402)
  Bottom Layer w0.254: P1.3@52.197,107.823 53.619,109.245 54.914,109.245 55.88,108.279 55.88,101.505 61.671,95.714 v1(61.671,95.402)
TMS: P1.5 U1.22 | length 24.7
  Top Layer w0.254: U1.22 56.063,88.143 56.69,88.143 57.336,88.788 57.336,88.822 57.582,89.068 57.582,91.023 60.452,93.893 v1@60.452,95.402
  Bottom Layer w0.254: P1.5@54.61,108 54.61,102.056 60.477,96.189 v1(60.477,95.402)
TX0: P3.6 U1.10 | length 24.7
  Top Layer w0.254: P3.6@41.492,98.018 41.492,98.526 42.153,99.187 47.288,99.187 50.99,102.889 53.912,102.889 55.499,101.302 55.499,97.917 56.947,96.469 58.115,96.469 58.268,96.622 U1.10
TX1: P3.20 U1.12 | length 19.4
  Top Layer w0.254: P3.20@43.54,97.8 43.911,98.171 46.99,98.171 51.2,102.381 53.702,102.381 54.991,101.092 54.991,97.441 55.868,96.564 U1.12
pads on no net: P1.7 P1.8 P6.2 P6.3 P6.MH1 P6.MH2 Q1.2 Q1.4 U1.7 U1.8 U4.4

## Polygon pours and split planes (outlines as drawn)
GND on Bottom Layer "Bottom Layer-No Net" (solid, remove dead copper, pour order 1000): 40,112 86,112 86,66 40,66
GND on Top Layer "Bottom Layer-No Net" (solid, remove dead copper, pour order 1000): 40,112 40,65.986 86,65.986 86,112

## Other copper
Top Layer:
  text "UNICORN 1" at 41,73.5 h1.52
  text "315-434 MHz" at 72.5,73.5 h1.2

## Silkscreen, mask and mechanical layers (free items; w line width, h text height)
Mechanical 1:
  lines w0.254: 39.246,112.5 39.754,112.5 ; 39.5,112.246 39.5,112.754 ; 86.246,65.5 86.754,65.5 ; 86.5,65.246 86.5,65.754
  text "39.5,112.5 (mm)" at 39.754,112.5 h1.52
  text "86.5,65.5 (mm)" at 86.754,65.5 h1.52
Border:
  the board outline again, w0.254

## Text inside footprints (layer, text, board x,y; h text height)
P1: Top Overlay "10" at 61.468,109.982 h0.76; Top Overlay "9" at 61.468,107.442 h0.76; Top Overlay "1" at 47.244,107.442 h0.76; Top Overlay "2" at 46.99,109.982 h0.76
P3: Top Overlay "15" at 43.532,114.056 h0.76 r270; Top Overlay "1" at 40.992,113.04 h0.76 r270; Top Overlay "14" at 40.992,75.956 h0.76 r270; Top Overlay "28" at 43.532,75.956 h0.76 r270
P6: Mechanical 1 "PCB Edge" at 56.924,65.1 h0.25